# EAGLE board sensor_panelized (EAGLE 5.11), part 1 of 2
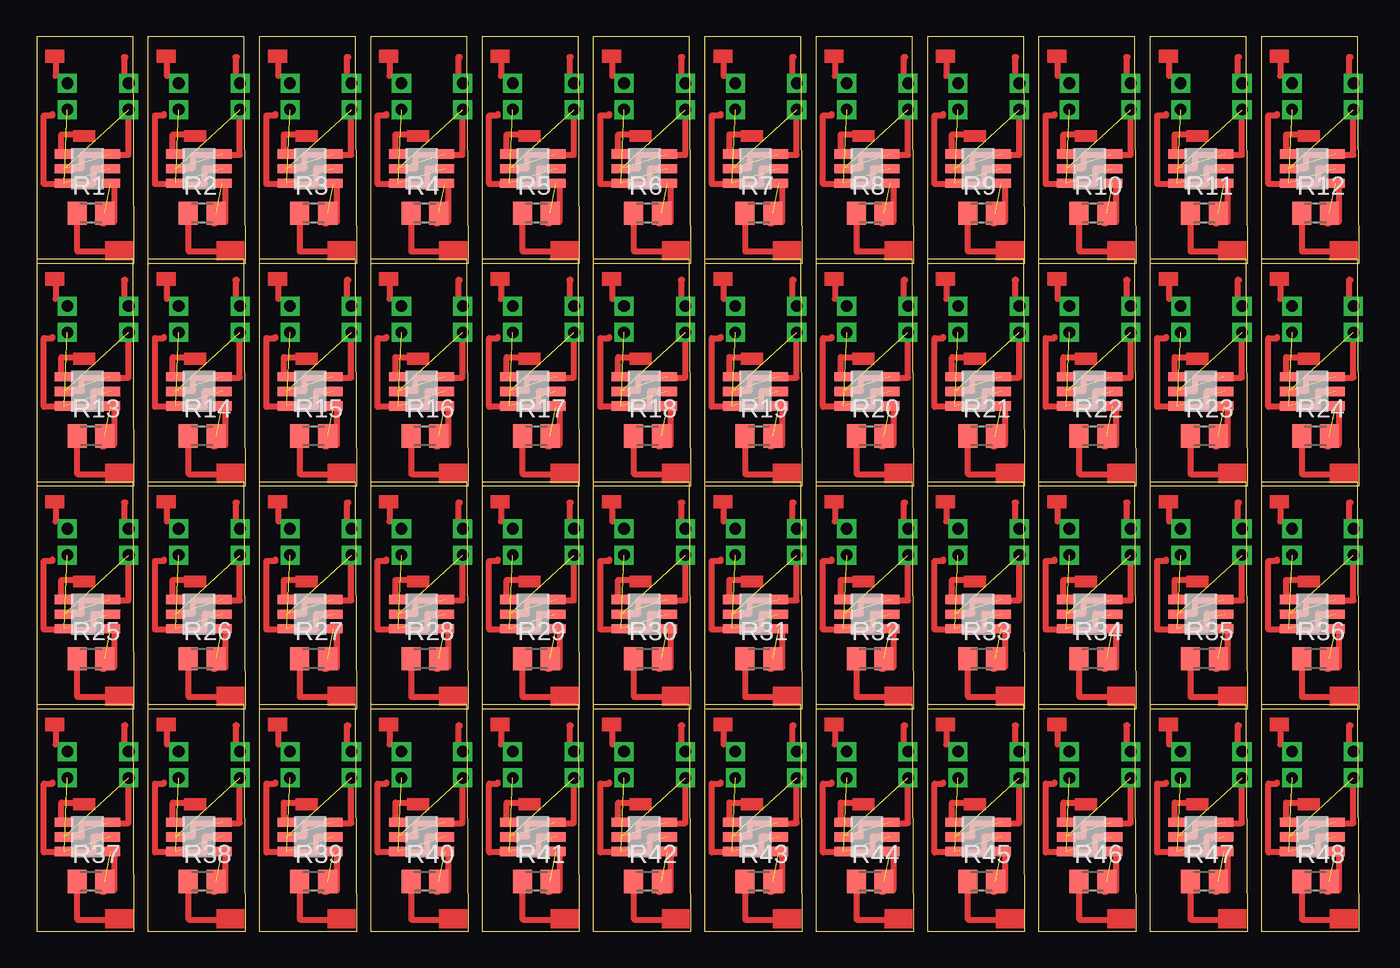
[diagram p0: board, top side]
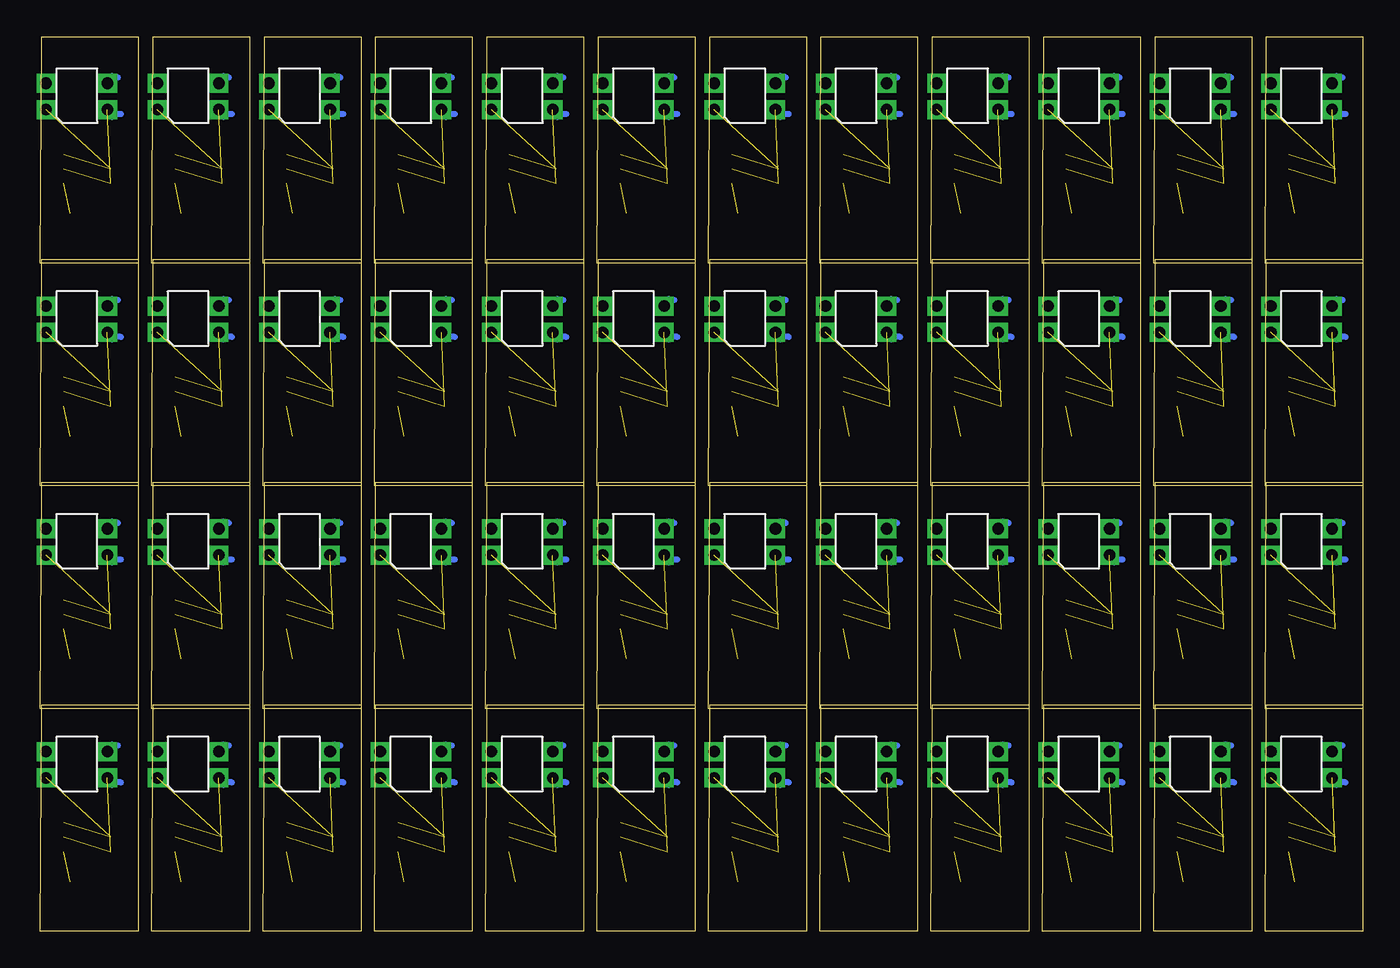
[diagram p1: board, bottom side, seen from below]

Size 90.52 x 61.22 mm. Coordinates in mm from the lower left corner, seen from the top.
Outline: 0,45.72 6.7,45.72 6.6,61.22 0,61.22 0,45.72
Outline: 7.62,45.72 14.32,45.72 14.22,61.22 7.62,61.22 7.62,45.72
Outline: 15.24,45.72 21.94,45.72 21.84,61.22 15.24,61.22 15.24,45.72
Outline: 22.86,45.72 29.56,45.72 29.46,61.22 22.86,61.22 22.86,45.72
Outline: 30.48,45.72 37.18,45.72 37.08,61.22 30.48,61.22 30.48,45.72
Outline: 38.1,45.72 44.8,45.72 44.7,61.22 38.1,61.22 38.1,45.72
Outline: 45.72,45.72 52.42,45.72 52.32,61.22 45.72,61.22 45.72,45.72
Outline: 53.34,45.72 60.04,45.72 59.94,61.22 53.34,61.22 53.34,45.72
Outline: 60.96,45.72 67.66,45.72 67.56,61.22 60.96,61.22 60.96,45.72
Outline: 68.58,45.72 75.28,45.72 75.18,61.22 68.58,61.22 68.58,45.72
Outline: 76.2,45.72 82.9,45.72 82.8,61.22 76.2,61.22 76.2,45.72
Outline: 83.82,45.72 90.52,45.72 90.42,61.22 83.82,61.22 83.82,45.72
Outline: 0,30.48 6.7,30.48 6.6,45.98 0,45.98 0,30.48
Outline: 7.62,30.48 14.32,30.48 14.22,45.98 7.62,45.98 7.62,30.48
Outline: 15.24,30.48 21.94,30.48 21.84,45.98 15.24,45.98 15.24,30.48
Outline: 22.86,30.48 29.56,30.48 29.46,45.98 22.86,45.98 22.86,30.48
Outline: 30.48,30.48 37.18,30.48 37.08,45.98 30.48,45.98 30.48,30.48
Outline: 38.1,30.48 44.8,30.48 44.7,45.98 38.1,45.98 38.1,30.48
Outline: 45.72,30.48 52.42,30.48 52.32,45.98 45.72,45.98 45.72,30.48
Outline: 53.34,30.48 60.04,30.48 59.94,45.98 53.34,45.98 53.34,30.48
Outline: 60.96,30.48 67.66,30.48 67.56,45.98 60.96,45.98 60.96,30.48
Outline: 68.58,30.48 75.28,30.48 75.18,45.98 68.58,45.98 68.58,30.48
Outline: 76.2,30.48 82.9,30.48 82.8,45.98 76.2,45.98 76.2,30.48
Outline: 83.82,30.48 90.52,30.48 90.42,45.98 83.82,45.98 83.82,30.48
Outline: 0,15.24 6.7,15.24 6.6,30.74 0,30.74 0,15.24
Outline: 7.62,15.24 14.32,15.24 14.22,30.74 7.62,30.74 7.62,15.24
Outline: 15.24,15.24 21.94,15.24 21.84,30.74 15.24,30.74 15.24,15.24
Outline: 22.86,15.24 29.56,15.24 29.46,30.74 22.86,30.74 22.86,15.24
Outline: 30.48,15.24 37.18,15.24 37.08,30.74 30.48,30.74 30.48,15.24
Outline: 38.1,15.24 44.8,15.24 44.7,30.74 38.1,30.74 38.1,15.24
Outline: 45.72,15.24 52.42,15.24 52.32,30.74 45.72,30.74 45.72,15.24
Outline: 53.34,15.24 60.04,15.24 59.94,30.74 53.34,30.74 53.34,15.24
Outline: 60.96,15.24 67.66,15.24 67.56,30.74 60.96,30.74 60.96,15.24
Outline: 68.58,15.24 75.28,15.24 75.18,30.74 68.58,30.74 68.58,15.24
Outline: 76.2,15.24 82.9,15.24 82.8,30.74 76.2,30.74 76.2,15.24
Outline: 83.82,15.24 90.52,15.24 90.42,30.74 83.82,30.74 83.82,15.24
Outline: 0,0 6.7,0 6.6,15.5 0,15.5 0,0
Outline: 7.62,0 14.32,0 14.22,15.5 7.62,15.5 7.62,0
Outline: 15.24,0 21.94,0 21.84,15.5 15.24,15.5 15.24,0
Outline: 22.86,0 29.56,0 29.46,15.5 22.86,15.5 22.86,0
Outline: 30.48,0 37.18,0 37.08,15.5 30.48,15.5 30.48,0
Outline: 38.1,0 44.8,0 44.7,15.5 38.1,15.5 38.1,0
Outline: 45.72,0 52.42,0 52.32,15.5 45.72,15.5 45.72,0
Outline: 53.34,0 60.04,0 59.94,15.5 53.34,15.5 53.34,0
Outline: 60.96,0 67.66,0 67.56,15.5 60.96,15.5 60.96,0
Outline: 68.58,0 75.28,0 75.18,15.5 68.58,15.5 68.58,0
Outline: 76.2,0 82.9,0 82.8,15.5 76.2,15.5 76.2,0
Outline: 83.82,0 90.52,0 90.42,15.5 83.82,15.5 83.82,0
Copper layers (1*16): Top 0.035mm / dielectric 1.5mm / Bottom 0.035mm
Design rules "default": minimum track width 10mil, minimum drill 24mil, track to track 8mil, track to pad 8mil, pad to pad 8mil, via to via 8mil, smd to smd 8mil, copper to edge 40mil, drill to drill 8mil, minimum pad ring 10mil, minimum via ring 8mil, stop-mask expansion 4mil, vias tented up to drill 0mil, thermal gap 10mil

## Footprints (pad centres in the part's own frame; a part is rotated, then mirrored left to right if it is on the bottom)
M0805 = smd 1.3 x 1.6: 1 -0.95,0; 2 0.95,0
MA125 = smd 1.27 x 0.635: 1 2,-0.6; 2 2,-1.6; 3 2,-2.6; 4 -1.2,-2.6; 5 -1.2,-1.6; 6 -1.2,-0.6
TPR-105F = drill 0.8 square: 1 2.7,1.5; 2 -1.5,1.5; 3 -1.5,-0.3; 4 2.7,-0.3

## Placement (x,y rotation side)
R1  1kohm  [M0805]  3.72,49.13 0 top
R2  1kohm  [M0805]  11.34,49.13 0 top
R3  1kohm  [M0805]  18.96,49.13 0 top
R4  1kohm  [M0805]  26.58,49.13 0 top
R5  1kohm  [M0805]  34.2,49.13 0 top
R6  1kohm  [M0805]  41.82,49.13 0 top
R7  1kohm  [M0805]  49.44,49.13 0 top
R8  1kohm  [M0805]  57.06,49.13 0 top
R9  1kohm  [M0805]  64.68,49.13 0 top
R10  1kohm  [M0805]  72.3,49.13 0 top
R11  1kohm  [M0805]  79.92,49.13 0 top
R12  1kohm  [M0805]  87.54,49.13 0 top
R13  1kohm  [M0805]  3.72,33.89 0 top
R14  1kohm  [M0805]  11.34,33.89 0 top
R15  1kohm  [M0805]  18.96,33.89 0 top
R16  1kohm  [M0805]  26.58,33.89 0 top
R17  1kohm  [M0805]  34.2,33.89 0 top
R18  1kohm  [M0805]  41.82,33.89 0 top
R19  1kohm  [M0805]  49.44,33.89 0 top
R20  1kohm  [M0805]  57.06,33.89 0 top
R21  1kohm  [M0805]  64.68,33.89 0 top
R22  1kohm  [M0805]  72.3,33.89 0 top
R23  1kohm  [M0805]  79.92,33.89 0 top
R24  1kohm  [M0805]  87.54,33.89 0 top
R25  1kohm  [M0805]  3.72,18.65 0 top
R26  1kohm  [M0805]  11.34,18.65 0 top
R27  1kohm  [M0805]  18.96,18.65 0 top
R28  1kohm  [M0805]  26.58,18.65 0 top
R29  1kohm  [M0805]  34.2,18.65 0 top
R30  1kohm  [M0805]  41.82,18.65 0 top
R31  1kohm  [M0805]  49.44,18.65 0 top
R32  1kohm  [M0805]  57.06,18.65 0 top
R33  1kohm  [M0805]  64.68,18.65 0 top
R34  1kohm  [M0805]  72.3,18.65 0 top
R35  1kohm  [M0805]  79.92,18.65 0 top
R36  1kohm  [M0805]  87.54,18.65 0 top
R37  1kohm  [M0805]  3.72,3.41 0 top
R38  1kohm  [M0805]  11.34,3.41 0 top
R39  1kohm  [M0805]  18.96,3.41 0 top
R40  1kohm  [M0805]  26.58,3.41 0 top
R41  1kohm  [M0805]  34.2,3.41 0 top
R42  1kohm  [M0805]  41.82,3.41 0 top
R43  1kohm  [M0805]  49.44,3.41 0 top
R44  1kohm  [M0805]  57.06,3.41 0 top
R45  1kohm  [M0805]  64.68,3.41 0 top
R46  1kohm  [M0805]  72.3,3.41 0 top
R47  1kohm  [M0805]  79.92,3.41 0 top
R48  1kohm  [M0805]  87.54,3.41 0 top
U$1  MA125  [MA125]  3.09,53.78 0 top
U$2  TPR-105F  [TPR-105F]  3.61,57.72 180 bottom
U$3  MA125  [MA125]  10.71,53.78 0 top
U$4  TPR-105F  [TPR-105F]  11.23,57.72 180 bottom
U$5  MA125  [MA125]  18.33,53.78 0 top
U$6  TPR-105F  [TPR-105F]  18.85,57.72 180 bottom
U$7  MA125  [MA125]  25.95,53.78 0 top
U$8  TPR-105F  [TPR-105F]  26.47,57.72 180 bottom
U$9  MA125  [MA125]  33.57,53.78 0 top
U$10  TPR-105F  [TPR-105F]  34.09,57.72 180 bottom
U$11  MA125  [MA125]  41.19,53.78 0 top
U$12  TPR-105F  [TPR-105F]  41.71,57.72 180 bottom
U$13  MA125  [MA125]  48.81,53.78 0 top
U$14  TPR-105F  [TPR-105F]  49.33,57.72 180 bottom
U$15  MA125  [MA125]  56.43,53.78 0 top
U$16  TPR-105F  [TPR-105F]  56.95,57.72 180 bottom
U$17  MA125  [MA125]  64.05,53.78 0 top
U$18  TPR-105F  [TPR-105F]  64.57,57.72 180 bottom
U$19  MA125  [MA125]  71.67,53.78 0 top
U$20  TPR-105F  [TPR-105F]  72.19,57.72 180 bottom
U$21  MA125  [MA125]  79.29,53.78 0 top
U$22  TPR-105F  [TPR-105F]  79.81,57.72 180 bottom
U$23  MA125  [MA125]  86.91,53.78 0 top
U$24  TPR-105F  [TPR-105F]  87.43,57.72 180 bottom
U$25  MA125  [MA125]  3.09,38.54 0 top
U$26  TPR-105F  [TPR-105F]  3.61,42.48 180 bottom
U$27  MA125  [MA125]  10.71,38.54 0 top
U$28  TPR-105F  [TPR-105F]  11.23,42.48 180 bottom
U$29  MA125  [MA125]  18.33,38.54 0 top
U$30  TPR-105F  [TPR-105F]  18.85,42.48 180 bottom
U$31  MA125  [MA125]  25.95,38.54 0 top
U$32  TPR-105F  [TPR-105F]  26.47,42.48 180 bottom
U$33  MA125  [MA125]  33.57,38.54 0 top
U$34  TPR-105F  [TPR-105F]  34.09,42.48 180 bottom
U$35  MA125  [MA125]  41.19,38.54 0 top
U$36  TPR-105F  [TPR-105F]  41.71,42.48 180 bottom
U$37  MA125  [MA125]  48.81,38.54 0 top
U$38  TPR-105F  [TPR-105F]  49.33,42.48 180 bottom
U$39  MA125  [MA125]  56.43,38.54 0 top
U$40  TPR-105F  [TPR-105F]  56.95,42.48 180 bottom
U$41  MA125  [MA125]  64.05,38.54 0 top
U$42  TPR-105F  [TPR-105F]  64.57,42.48 180 bottom
U$43  MA125  [MA125]  71.67,38.54 0 top
U$44  TPR-105F  [TPR-105F]  72.19,42.48 180 bottom
U$45  MA125  [MA125]  79.29,38.54 0 top
U$46  TPR-105F  [TPR-105F]  79.81,42.48 180 bottom
U$47  MA125  [MA125]  86.91,38.54 0 top
U$48  TPR-105F  [TPR-105F]  87.43,42.48 180 bottom
U$49  MA125  [MA125]  3.09,23.3 0 top
U$50  TPR-105F  [TPR-105F]  3.61,27.24 180 bottom
U$51  MA125  [MA125]  10.71,23.3 0 top
U$52  TPR-105F  [TPR-105F]  11.23,27.24 180 bottom
U$53  MA125  [MA125]  18.33,23.3 0 top
U$54  TPR-105F  [TPR-105F]  18.85,27.24 180 bottom
U$55  MA125  [MA125]  25.95,23.3 0 top
U$56  TPR-105F  [TPR-105F]  26.47,27.24 180 bottom
U$57  MA125  [MA125]  33.57,23.3 0 top
U$58  TPR-105F  [TPR-105F]  34.09,27.24 180 bottom
U$59  MA125  [MA125]  41.19,23.3 0 top
U$60  TPR-105F  [TPR-105F]  41.71,27.24 180 bottom
U$61  MA125  [MA125]  48.81,23.3 0 top
U$62  TPR-105F  [TPR-105F]  49.33,27.24 180 bottom
U$63  MA125  [MA125]  56.43,23.3 0 top
U$64  TPR-105F  [TPR-105F]  56.95,27.24 180 bottom
U$65  MA125  [MA125]  64.05,23.3 0 top
U$66  TPR-105F  [TPR-105F]  64.57,27.24 180 bottom
U$67  MA125  [MA125]  71.67,23.3 0 top
U$68  TPR-105F  [TPR-105F]  72.19,27.24 180 bottom
U$69  MA125  [MA125]  79.29,23.3 0 top
U$70  TPR-105F  [TPR-105F]  79.81,27.24 180 bottom
U$71  MA125  [MA125]  86.91,23.3 0 top
U$72  TPR-105F  [TPR-105F]  87.43,27.24 180 bottom
U$73  MA125  [MA125]  3.09,8.06 0 top
U$74  TPR-105F  [TPR-105F]  3.61,12 180 bottom
U$75  MA125  [MA125]  10.71,8.06 0 top
U$76  TPR-105F  [TPR-105F]  11.23,12 180 bottom
U$77  MA125  [MA125]  18.33,8.06 0 top
U$78  TPR-105F  [TPR-105F]  18.85,12 180 bottom
U$79  MA125  [MA125]  25.95,8.06 0 top
U$80  TPR-105F  [TPR-105F]  26.47,12 180 bottom
U$81  MA125  [MA125]  33.57,8.06 0 top
U$82  TPR-105F  [TPR-105F]  34.09,12 180 bottom
U$83  MA125  [MA125]  41.19,8.06 0 top
U$84  TPR-105F  [TPR-105F]  41.71,12 180 bottom
U$85  MA125  [MA125]  48.81,8.06 0 top
U$86  TPR-105F  [TPR-105F]  49.33,12 180 bottom
U$87  MA125  [MA125]  56.43,8.06 0 top
U$88  TPR-105F  [TPR-105F]  56.95,12 180 bottom
U$89  MA125  [MA125]  64.05,8.06 0 top
U$90  TPR-105F  [TPR-105F]  64.57,12 180 bottom
U$91  MA125  [MA125]  71.67,8.06 0 top
U$92  TPR-105F  [TPR-105F]  72.19,12 180 bottom
U$93  MA125  [MA125]  79.29,8.06 0 top
U$94  TPR-105F  [TPR-105F]  79.81,12 180 bottom
U$95  MA125  [MA125]  86.91,8.06 0 top
U$96  TPR-105F  [TPR-105F]  87.43,12 180 bottom

## Library data of the parts
R1-R48 = rcl
U$1-U$96 = myparts

## Nets
N$1: U$1.1 U$1.5 U$2.1
N$2: U$1.2 U$1.4 U$2.2
N$3: R1.2 U$1.3
N$4: U$1.6
N$5: R1.1
N$6: U$2.3
N$7: U$2.4
N$21: U$3.1 U$3.5 U$4.1
N$22: U$3.2 U$3.4 U$4.2
N$23: R2.2 U$3.3
N$24: U$3.6
N$25: R2.1
N$26: U$4.3
N$27: U$4.4
N$41: U$5.1 U$5.5 U$6.1
N$42: U$5.2 U$5.4 U$6.2
N$43: R3.2 U$5.3
N$44: U$5.6
N$45: R3.1
N$46: U$6.3
N$47: U$6.4
N$61: U$7.1 U$7.5 U$8.1
N$62: U$7.2 U$7.4 U$8.2
N$63: R4.2 U$7.3
N$64: U$7.6
N$65: R4.1
N$66: U$8.3
N$67: U$8.4
N$81: U$9.1 U$9.5 U$10.1
N$82: U$9.2 U$9.4 U$10.2
N$83: R5.2 U$9.3
N$84: U$9.6
N$85: R5.1
N$86: U$10.3
N$87: U$10.4
N$101: U$11.1 U$11.5 U$12.1
N$102: U$11.2 U$11.4 U$12.2
N$103: R6.2 U$11.3
N$104: U$11.6
N$105: R6.1
N$106: U$12.3
N$107: U$12.4
N$121: U$13.1 U$13.5 U$14.1
N$122: U$13.2 U$13.4 U$14.2
N$123: R7.2 U$13.3
N$124: U$13.6
N$125: R7.1
N$126: U$14.3
N$127: U$14.4
N$141: U$15.1 U$15.5 U$16.1
N$142: U$15.2 U$15.4 U$16.2
N$143: R8.2 U$15.3
N$144: U$15.6
N$145: R8.1
N$146: U$16.3
N$147: U$16.4
N$161: U$17.1 U$17.5 U$18.1
N$162: U$17.2 U$17.4 U$18.2
N$163: R9.2 U$17.3
N$164: U$17.6
N$165: R9.1
N$166: U$18.3
N$167: U$18.4
N$181: U$19.1 U$19.5 U$20.1
N$182: U$19.2 U$19.4 U$20.2
N$183: R10.2 U$19.3
N$184: U$19.6
N$185: R10.1
N$186: U$20.3
N$187: U$20.4
N$201: U$21.1 U$21.5 U$22.1
N$202: U$21.2 U$21.4 U$22.2
N$203: R11.2 U$21.3
N$204: U$21.6
N$205: R11.1
N$206: U$22.3
N$207: U$22.4
N$221: U$23.1 U$23.5 U$24.1
N$222: U$23.2 U$23.4 U$24.2
N$223: R12.2 U$23.3
N$224: U$23.6
N$225: R12.1
N$226: U$24.3
N$227: U$24.4
N$241: U$25.1 U$25.5 U$26.1
N$242: U$25.2 U$25.4 U$26.2
N$243: R13.2 U$25.3
N$244: U$25.6
N$245: R13.1
N$246: U$26.3
N$247: U$26.4
N$261: U$27.1 U$27.5 U$28.1
N$262: U$27.2 U$27.4 U$28.2
N$263: R14.2 U$27.3
N$264: U$27.6
N$265: R14.1
N$266: U$28.3
N$267: U$28.4
N$281: U$29.1 U$29.5 U$30.1
N$282: U$29.2 U$29.4 U$30.2
N$283: R15.2 U$29.3
N$284: U$29.6
N$285: R15.1
N$286: U$30.3
N$287: U$30.4
N$301: U$31.1 U$31.5 U$32.1
N$302: U$31.2 U$31.4 U$32.2
N$303: R16.2 U$31.3
N$304: U$31.6
N$305: R16.1
N$306: U$32.3
N$307: U$32.4
N$321: U$33.1 U$33.5 U$34.1
N$322: U$33.2 U$33.4 U$34.2
N$323: R17.2 U$33.3
N$324: U$33.6
N$325: R17.1
N$326: U$34.3
N$327: U$34.4
N$341: U$35.1 U$35.5 U$36.1
N$342: U$35.2 U$35.4 U$36.2
N$343: R18.2 U$35.3
N$344: U$35.6
N$345: R18.1
N$346: U$36.3
N$347: U$36.4
N$361: U$37.1 U$37.5 U$38.1
N$362: U$37.2 U$37.4 U$38.2
N$363: R19.2 U$37.3
N$364: U$37.6
N$365: R19.1
N$366: U$38.3
N$367: U$38.4
N$381: U$39.1 U$39.5 U$40.1
N$382: U$39.2 U$39.4 U$40.2
N$383: R20.2 U$39.3
N$384: U$39.6
N$385: R20.1
N$386: U$40.3
N$387: U$40.4
N$401: U$41.1 U$41.5 U$42.1
N$402: U$41.2 U$41.4 U$42.2
N$403: R21.2 U$41.3
N$404: U$41.6
N$405: R21.1
N$406: U$42.3
N$407: U$42.4
N$421: U$43.1 U$43.5 U$44.1
N$422: U$43.2 U$43.4 U$44.2
N$423: R22.2 U$43.3
N$424: U$43.6
N$425: R22.1
N$426: U$44.3
N$427: U$44.4
N$441: U$45.1 U$45.5 U$46.1
N$442: U$45.2 U$45.4 U$46.2
N$443: R23.2 U$45.3
N$444: U$45.6
N$445: R23.1
N$446: U$46.3
N$447: U$46.4
N$461: U$47.1 U$47.5 U$48.1
N$462: U$47.2 U$47.4 U$48.2
N$463: R24.2 U$47.3
N$464: U$47.6
N$465: R24.1
N$466: U$48.3
N$467: U$48.4
N$481: U$49.1 U$49.5 U$50.1
N$482: U$49.2 U$49.4 U$50.2
N$483: R25.2 U$49.3
N$484: U$49.6
N$485: R25.1
N$486: U$50.3
N$487: U$50.4
N$501: U$51.1 U$51.5 U$52.1
N$502: U$51.2 U$51.4 U$52.2
N$503: R26.2 U$51.3
N$504: U$51.6
N$505: R26.1
N$506: U$52.3
N$507: U$52.4
N$521: U$53.1 U$53.5 U$54.1
N$522: U$53.2 U$53.4 U$54.2
N$523: R27.2 U$53.3
N$524: U$53.6
N$525: R27.1
N$526: U$54.3
N$527: U$54.4
N$541: U$55.1 U$55.5 U$56.1
N$542: U$55.2 U$55.4 U$56.2
N$543: R28.2 U$55.3
N$544: U$55.6
N$545: R28.1
N$546: U$56.3
N$547: U$56.4
N$561: U$57.1 U$57.5 U$58.1
N$562: U$57.2 U$57.4 U$58.2
N$563: R29.2 U$57.3
N$564: U$57.6
N$565: R29.1
N$566: U$58.3
N$567: U$58.4
N$581: U$59.1 U$59.5 U$60.1
N$582: U$59.2 U$59.4 U$60.2
N$583: R30.2 U$59.3
N$584: U$59.6
N$585: R30.1
N$586: U$60.3
N$587: U$60.4
N$601: U$61.1 U$61.5 U$62.1
N$602: U$61.2 U$61.4 U$62.2
N$603: R31.2 U$61.3
N$604: U$61.6
N$605: R31.1
N$606: U$62.3
N$607: U$62.4
N$621: U$63.1 U$63.5 U$64.1
N$622: U$63.2 U$63.4 U$64.2
N$623: R32.2 U$63.3
N$624: U$63.6
N$625: R32.1
N$626: U$64.3
N$627: U$64.4
N$641: U$65.1 U$65.5 U$66.1
N$642: U$65.2 U$65.4 U$66.2
N$643: R33.2 U$65.3
N$644: U$65.6
N$645: R33.1
N$646: U$66.3
N$647: U$66.4
N$661: U$67.1 U$67.5 U$68.1
N$662: U$67.2 U$67.4 U$68.2
N$663: R34.2 U$67.3
N$664: U$67.6
N$665: R34.1
N$666: U$68.3
N$667: U$68.4
N$681: U$69.1 U$69.5 U$70.1
N$682: U$69.2 U$69.4 U$70.2
N$683: R35.2 U$69.3
N$684: U$69.6
N$685: R35.1
N$686: U$70.3
N$687: U$70.4
N$701: U$71.1 U$71.5 U$72.1
N$702: U$71.2 U$71.4 U$72.2
N$703: R36.2 U$71.3
N$704: U$71.6
N$705: R36.1
N$706: U$72.3
N$707: U$72.4
N$721: U$73.1 U$73.5 U$74.1
N$722: U$73.2 U$73.4 U$74.2
N$723: R37.2 U$73.3
N$724: U$73.6
N$725: R37.1
N$726: U$74.3
N$727: U$74.4
N$741: U$75.1 U$75.5 U$76.1
N$742: U$75.2 U$75.4 U$76.2
N$743: R38.2 U$75.3
N$744: U$75.6
N$745: R38.1
N$746: U$76.3
N$747: U$76.4
N$761: U$77.1 U$77.5 U$78.1
N$762: U$77.2 U$77.4 U$78.2
N$763: R39.2 U$77.3
N$764: U$77.6
N$765: R39.1
N$766: U$78.3
N$767: U$78.4
N$781: U$79.1 U$79.5 U$80.1
N$782: U$79.2 U$79.4 U$80.2
N$783: R40.2 U$79.3
N$784: U$79.6
N$785: R40.1
N$786: U$80.3
N$787: U$80.4
N$801: U$81.1 U$81.5 U$82.1
N$802: U$81.2 U$81.4 U$82.2
N$803: R41.2 U$81.3
N$804: U$81.6
N$805: R41.1
N$806: U$82.3
N$807: U$82.4
N$821: U$83.1 U$83.5 U$84.1
N$822: U$83.2 U$83.4 U$84.2
N$823: R42.2 U$83.3
N$824: U$83.6
N$825: R42.1
N$826: U$84.3
N$827: U$84.4
N$841: U$85.1 U$85.5 U$86.1
N$842: U$85.2 U$85.4 U$86.2
N$843: R43.2 U$85.3
N$844: U$85.6
N$845: R43.1
N$846: U$86.3
N$847: U$86.4
N$861: U$87.1 U$87.5 U$88.1
N$862: U$87.2 U$87.4 U$88.2
N$863: R44.2 U$87.3
N$864: U$87.6
N$865: R44.1
N$866: U$88.3
N$867: U$88.4
N$881: U$89.1 U$89.5 U$90.1
N$882: U$89.2 U$89.4 U$90.2
N$883: R45.2 U$89.3
N$884: U$89.6
N$885: R45.1
N$886: U$90.3
N$887: U$90.4
N$901: U$91.1 U$91.5 U$92.1
N$902: U$91.2 U$91.4 U$92.2
N$903: R46.2 U$91.3
N$904: U$91.6
N$905: R46.1
N$906: U$92.3
N$907: U$92.4
N$921: U$93.1 U$93.5 U$94.1
N$922: U$93.2 U$93.4 U$94.2
N$923: R47.2 U$93.3
N$924: U$93.6
N$925: R47.1
N$926: U$94.3
N$927: U$94.4
N$941: U$95.1 U$95.5 U$96.1
N$942: U$95.2 U$95.4 U$96.2
N$943: R48.2 U$95.3
N$944: U$95.6
N$945: R48.1
N$946: U$96.3
N$947: U$96.4